# EAGLE board stepper_fw_bw_w_swich (EAGLE 6.4)
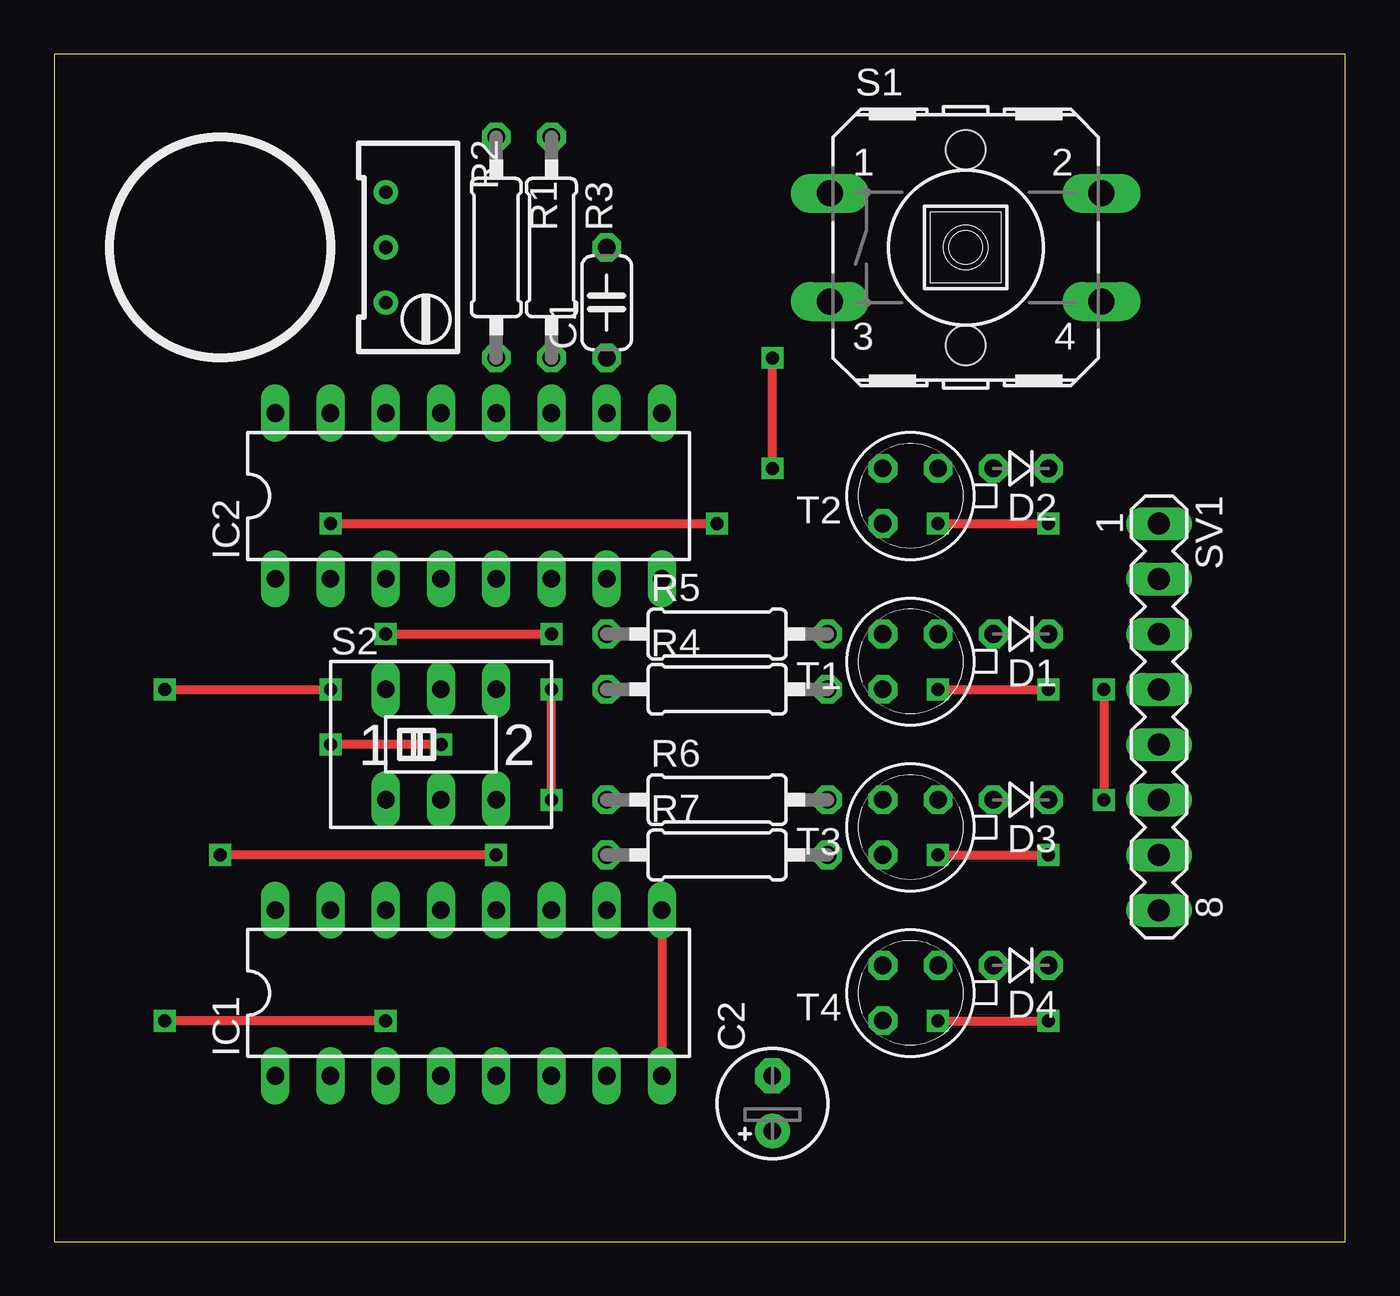
[diagram p0: board, top side]
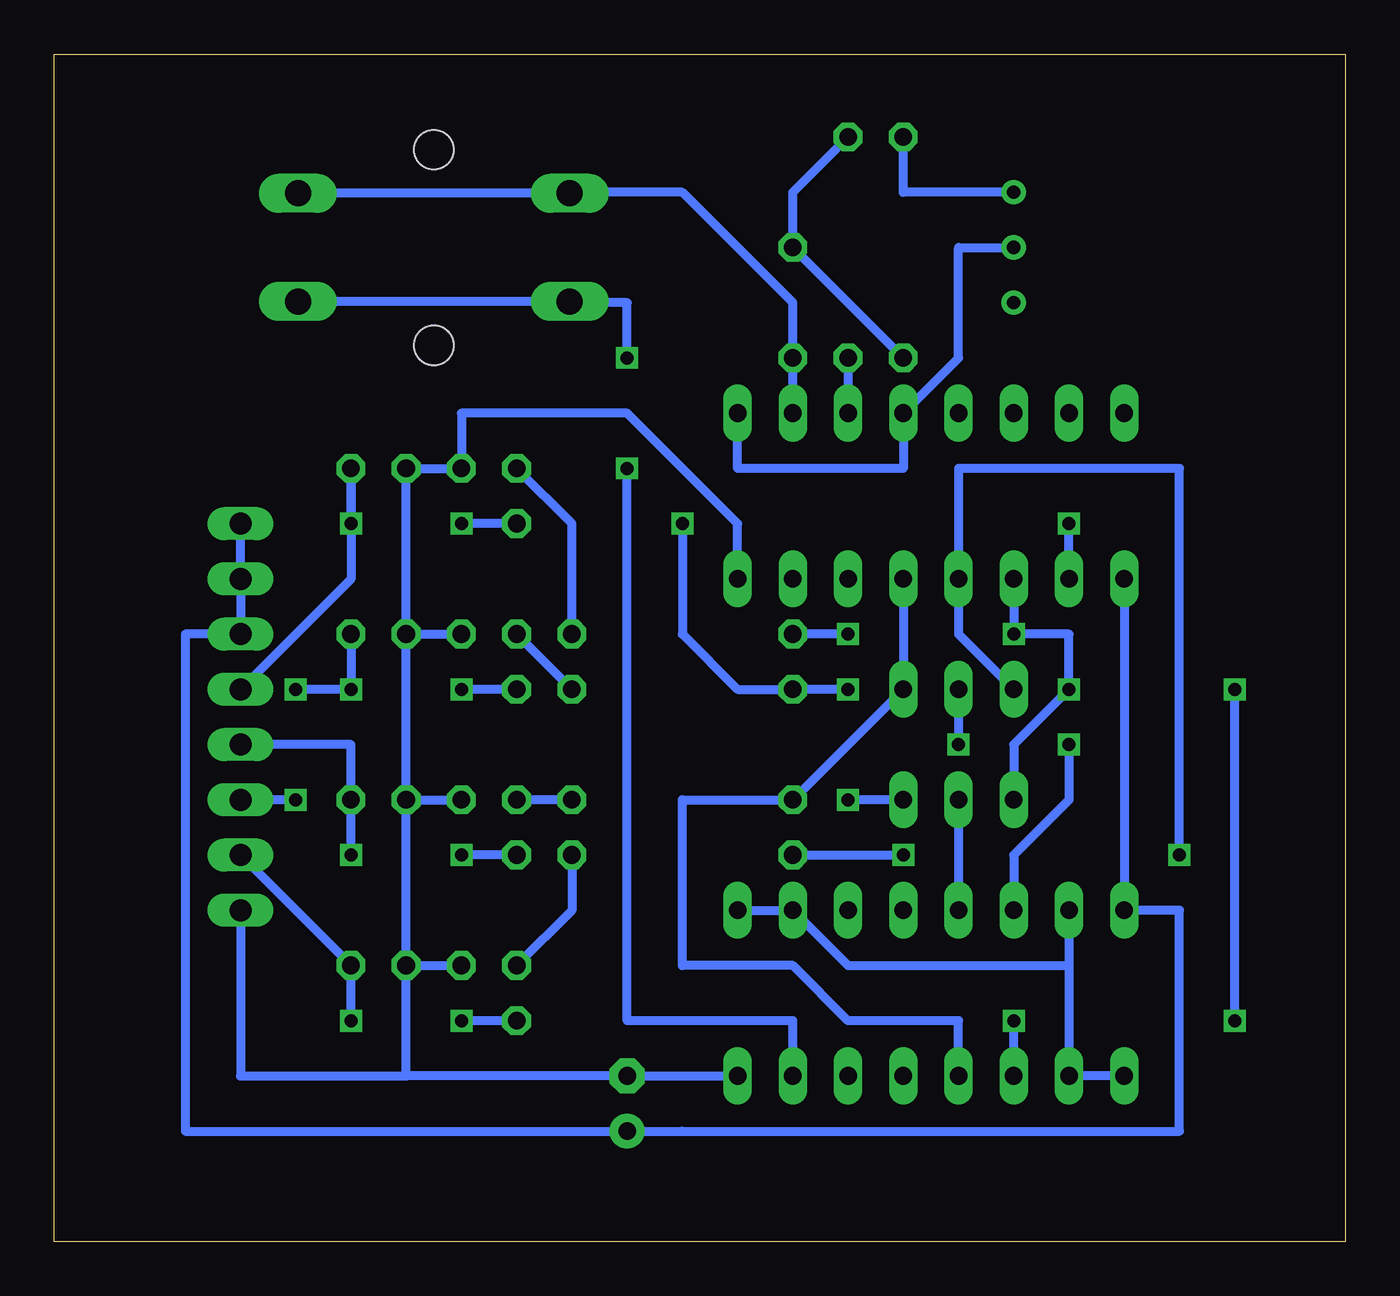
[diagram p1: board, bottom side, seen from below]

Size 59.36 x 54.6 mm. Coordinates in mm from the lower left corner, seen from the top.
Outline: 0,0 59.36,0 59.36,54.6 0,54.6 0,0
Copper layers (1*16): Top 0.035mm / dielectric 1.5mm / Bottom 0.035mm
Design rules "default": minimum track width 10mil, minimum drill 24mil, track to track 8mil, track to pad 8mil, pad to pad 8mil, via to via 8mil, smd to smd 8mil, copper to edge 40mil, drill to drill 8mil, minimum pad ring 10mil, minimum via ring 8mil, stop-mask expansion 4mil, vias tented up to drill 0mil, thermal gap 10mil

## Footprints (pad centres in the part's own frame; a part is rotated, then mirrored left to right if it is on the bottom)
C050-024X044 = drill 0.813 octagon: 1 -2.54,0; 2 2.54,0
E2,5-5 = drill 0.813 pad 1.6: + -1.27,0 | drill 0.813 pad 1.6 octagon: - 1.27,0
D-2.5 = drill 0.813 octagon: A 1.27,0; C -1.27,0
DIL16 = drill 0.813 long: 1 -8.89,-3.81; 2 -6.35,-3.81; 3 -3.81,-3.81; 4 -1.27,-3.81; 5 1.27,-3.81; 6 3.81,-3.81; 7 6.35,-3.81; 8 8.89,-3.81; 9 8.89,3.81; 10 6.35,3.81; 11 3.81,3.81; 12 1.27,3.81; 13 -1.27,3.81; 14 -3.81,3.81; 15 -6.35,3.81; 16 -8.89,3.81
0207/10 = drill 0.813 octagon: 1 -5.08,0; 2 5.08,0
RTRIM64W = drill 0.61: 1 1.27,-2.54; 2 1.27,0; 3 1.27,2.54
B3F-40XX = drill 1.194 long: 1 -6.248,2.489; 2 6.248,2.489; 3 -6.248,-2.489; 4 6.248,-2.489 | hole 1.803: 0,-4.496; 0,4.496
A68-A31 = drill 0.813 long: 1 -2.54,-2.54; 2 0,-2.54; 3 2.54,-2.54; 4 -2.54,2.54; 5 0,2.54; 6 2.54,2.54
MA08-1 = drill 1.016 long: 1 -8.89,0; 2 -6.35,0; 3 -3.81,0; 4 -1.27,0; 5 1.27,0; 6 3.81,0; 7 6.35,0; 8 8.89,0
TO18 = drill 0.813 octagon: 1 -1.27,-1.27; 2 1.27,-1.27; 3 1.27,1.27

## Placement (x,y rotation side)
C1  0,1 µF  [C050-024X044]  25.4,43.18 90 top
C2  330 µF  [E2,5-5]  33.02,6.35 90 top
D1  1N4148  [D-2.5]  44.45,27.94 180 top
D2  1N4148  [D-2.5]  44.45,35.56 180 top
D3  1N4148  [D-2.5]  44.45,20.32 180 top
D4  1N4148  [D-2.5]  44.45,12.7 180 top
IC1  4076N  [DIL16]  19.05,11.43 0 top
IC2  4049N  [DIL16]  19.05,34.29 0 top
R1  5k6  [0207/10]  20.32,45.72 270 top
R2  10k  [RTRIM64W]  16.51,45.72 180 top
R3  34k  [0207/10]  22.86,45.72 270 top
R4  4k7  [0207/10]  30.48,25.4 0 top
R5  4k7  [0207/10]  30.48,27.94 0 top
R6  4k7  [0207/10]  30.48,20.32 0 top
R7  4k7  [0207/10]  30.48,17.78 0 top
S1  [B3F-40XX]  41.91,45.72 0 top
S2  [A68-A31]  17.78,22.86 0 top
SV1  [MA08-1]  50.8,24.13 270 top
T1  2N2222  [TO18]  39.37,26.67 180 top
T2  2N2222  [TO18]  39.37,34.29 180 top
T3  2N2222  [TO18]  39.37,19.05 180 top
T4  2N2222  [TO18]  39.37,11.43 180 top

## Library data of the parts
C1 C2 R1-R7 = rcl
D1-D4 = diode
IC1 IC2 = 40xx
S1 = switch-omron; MF: OMRON COMPONENTS USA; MPN: B3F-4000; OC_FARNELL: 176434; OC_NEWARK: 36K3105
S2 = switch
SV1 = con-lstb; OC_FARNELL: unknown; OC_NEWARK: unknown
T1-T4 = transistor

## Nets
A1: IC1.3 IC2.3 R5.1 S2.1
A2: IC2.2 R4.1 S2.3
A3: IC1.4 IC2.5 R6.1 S2.6
A4: IC2.4 R7.1 S2.4
N$1: IC2.9 IC2.12 R2.2
N$2: IC1.7 S1.3 S1.4
N$3: C1.2 R1.2 R3.1
N$4: IC2.11 R3.2
N$5: C1.1 IC2.10 S1.1 S1.2
N$6: R1.1 R2.1
N$7: IC1.13 S2.2
N$8: IC1.14 S2.5
N$9: R4.2 T1.2
N$10: R5.2 T2.2
N$11: R6.2 T3.2
N$12: R7.2 T4.2
Q0: D2.C SV1.4 T2.3
Q0NOT: D1.C SV1.6 T1.3
Q1: D3.C SV1.5 T3.3
Q1NOT: D4.C SV1.7 T4.3
VDD: C2.+ IC1.16 IC2.1 SV1.1 SV1.2 SV1.3
VSS: C2.- D1.A D2.A D3.A D4.A IC1.1 IC1.2 IC1.8 IC1.9 IC1.10 IC1.15 IC2.8 SV1.8 T1.1 T2.1 T3.1 T4.1

## Tracks (layer width: path | path; a pad name or v marks a point on that pad's centre or on a via)
A1  (via drill 0.6)
  Top 0.406: v15.24,27.94 v22.86,27.94 | v15.24,10.16 v5.08,10.16 | v5.08,25.4 v12.7,25.4
  Bottom 0.406: IC2.3 v15.24,27.94 12.7,27.94 v12.7,25.4 15.24,22.86 S2.1 | v22.86,27.94 R5.1 | IC1.3 v15.24,10.16 | v5.08,10.16 v5.08,25.4
A2  (via drill 0.6)
  Top 0.406: v22.86,20.32 v22.86,25.4 | v12.7,33.02 v30.48,33.02
  Bottom 0.406: S2.3 v22.86,20.32 | v22.86,25.4 R4.1 27.94,25.4 30.48,27.94 v30.48,33.02 | IC2.2 v12.7,33.02
A3
  Bottom 0.406: IC2.5 S2.6 R6.1 30.48,20.32 30.48,12.7 25.4,12.7 22.86,10.16 17.78,10.16 IC1.4
A4  (via drill 0.6)
  Top 0.406: v20.32,17.78 v7.62,17.78
  Bottom 0.406: S2.4 17.78,27.94 IC2.4 17.78,35.56 7.62,35.56 v7.62,17.78 | R7.1 v20.32,17.78
N$1
  Bottom 0.406: IC2.9 27.94,35.56 20.32,35.56 IC2.12 17.78,40.64 17.78,45.72 R2.2
N$2  (via drill 0.6)
  Top 0.406: v33.02,35.56 v33.02,40.64
  Bottom 0.406: IC1.7 25.4,10.16 33.02,10.16 v33.02,35.56 | v33.02,40.64 33.02,43.18 35.61,43.18 S1.3 S1.4
N$3
  Bottom 0.406: R3.1 25.4,48.26 C1.2 R1.2
N$4
  Bottom 0.406: R3.2 IC2.11
N$5
  Bottom 0.406: IC2.10 C1.1 25.4,43.18 30.48,48.26 35.61,48.26 S1.1 S1.2
N$6
  Bottom 0.406: R2.1 20.32,48.26 R1.1
N$7
  Bottom 0.406: S2.2 IC1.13
N$8  (via drill 0.6)
  Top 0.406: v17.78,22.86 v12.7,22.86
  Bottom 0.406: S2.5 v17.78,22.86 | v12.7,22.86 12.7,20.32 15.24,17.78 IC1.14
N$9
  Bottom 0.406: R4.2 T1.2
N$10
  Bottom 0.406: R5.2 35.56,33.02 T2.2
N$11
  Bottom 0.406: R6.2 T3.2
N$12
  Bottom 0.406: R7.2 35.56,15.24 T4.2
Q0  (via drill 0.6)
  Top 0.406: v40.64,33.02 v45.72,33.02
  Bottom 0.406: T2.3 v40.64,33.02 | v45.72,33.02 D2.C 45.72,30.48 SV1.4
Q0NOT  (via drill 0.6)
  Top 0.406: v40.64,25.4 v45.72,25.4 | v48.26,25.4 v48.26,20.32
  Bottom 0.406: T1.3 v40.64,25.4 | D1.C v45.72,25.4 v48.26,25.4 | v48.26,20.32 SV1.6
Q1  (via drill 0.6)
  Top 0.406: v40.64,17.78 v45.72,17.78
  Bottom 0.406: T3.3 v40.64,17.78 | v45.72,17.78 D3.C 45.72,22.86 SV1.5
Q1NOT  (via drill 0.6)
  Top 0.406: v40.64,10.16 v45.72,10.16
  Bottom 0.406: T4.3 v40.64,10.16 | v45.72,10.16 D4.C SV1.7
VDD
  Bottom 0.406: IC2.1 IC1.16 7.62,15.24 7.62,5.08 30.48,5.08 C2.+ 53.34,5.08 53.34,27.94 SV1.3 SV1.2 SV1.1
VSS
  Top 0.406: IC1.9 IC1.8
  Bottom 0.406: IC1.1 IC1.2 12.7,12.7 | IC1.9 IC1.10 22.86,12.7 12.7,12.7 | IC1.15 12.7,12.7 | 43.18,7.62 C2.- IC1.8 | 43.18,7.62 D4.A | D4.A D3.A | D3.A D1.A | D1.A D2.A T2.1 40.64,38.1 33.02,38.1 27.94,33.02 IC2.8 | D1.A T1.1 | D3.A T3.1 | D4.A T4.1 | SV1.8 50.8,7.62 43.18,7.62

## Text on the board
tValues: VDD | 15V | A1 | A2 | A3 | A4 | VSS